# Altium PCB board.PcbDoc
Units mm, origin at the board's own origin, x right, y up, seen from the top; angles counter-clockwise.
Board outline 30 x 16.2 mm, 2 copper layers (Top Layer, Bottom Layer); 12 components, 10 nets, 44 pads, 0 vias.
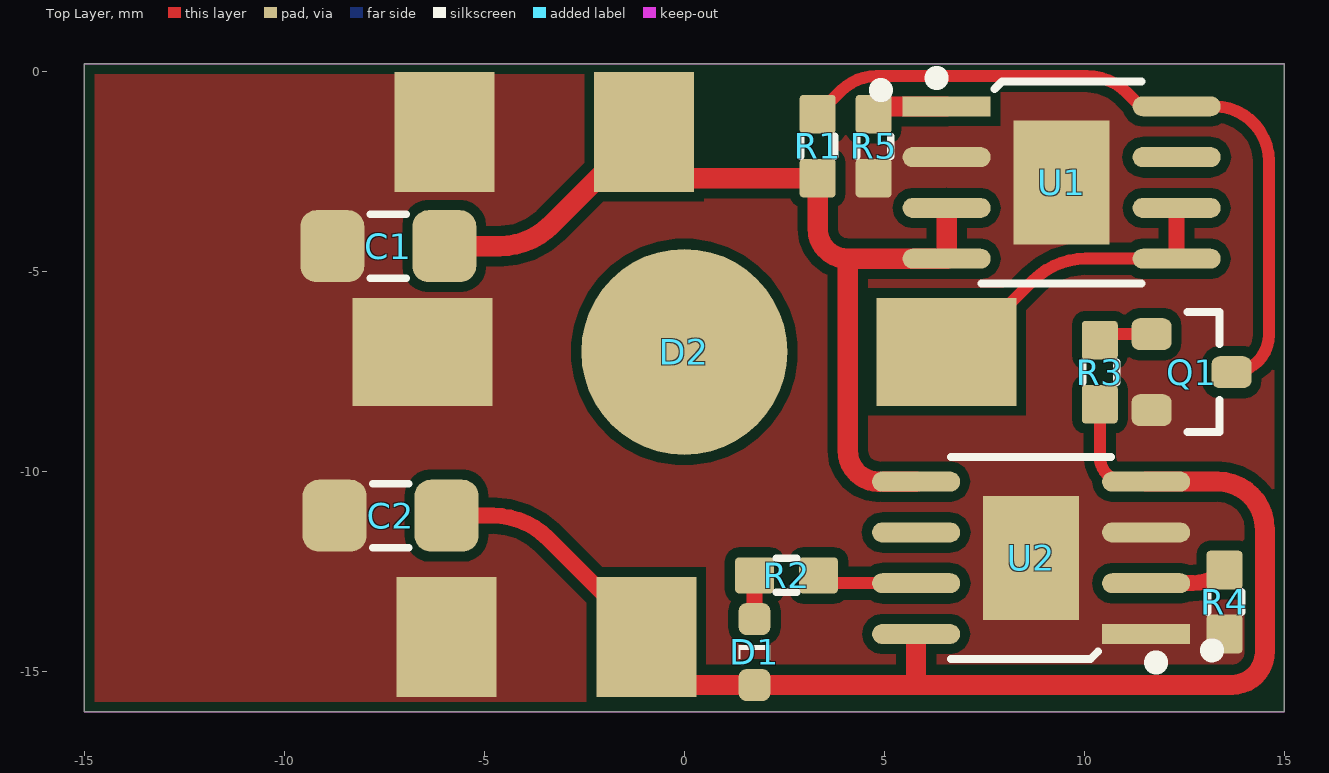
[diagram p0: Top Layer view]
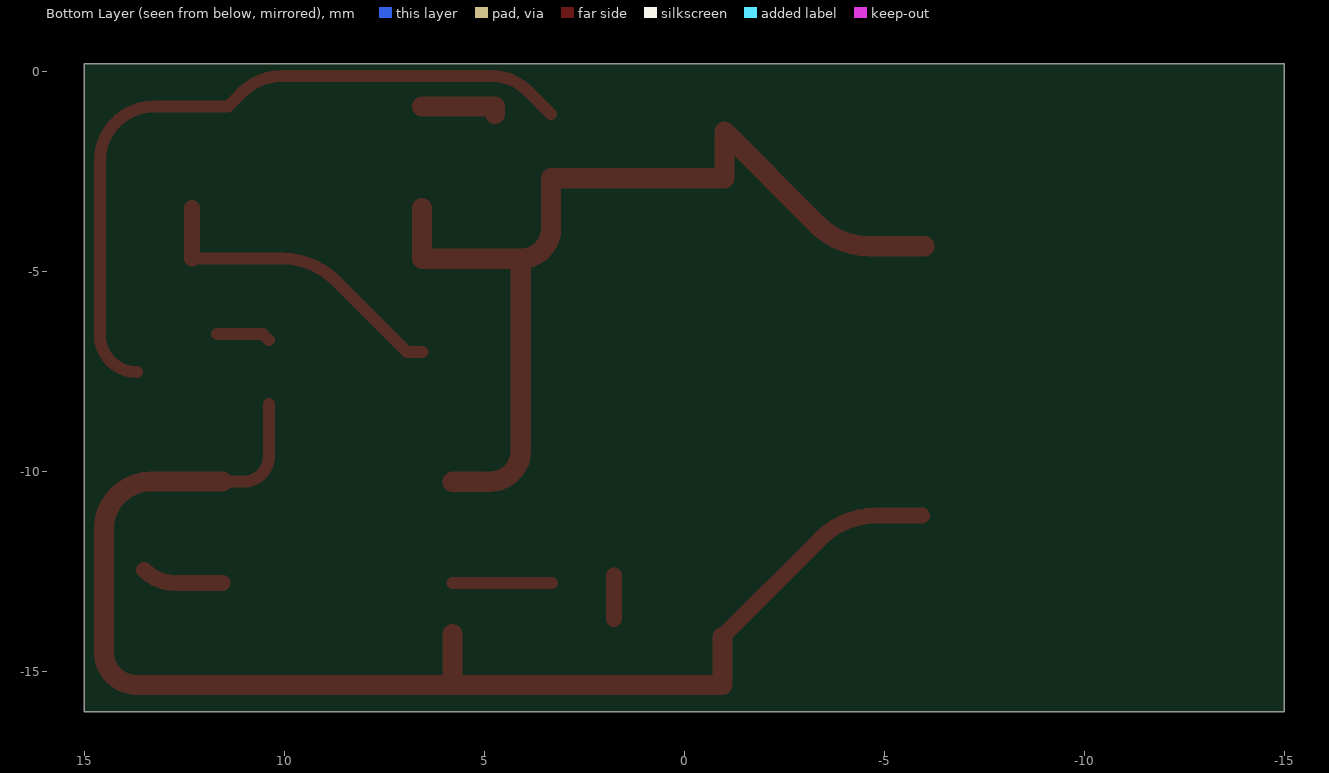
[diagram p1: Bottom Layer view, seen from below]
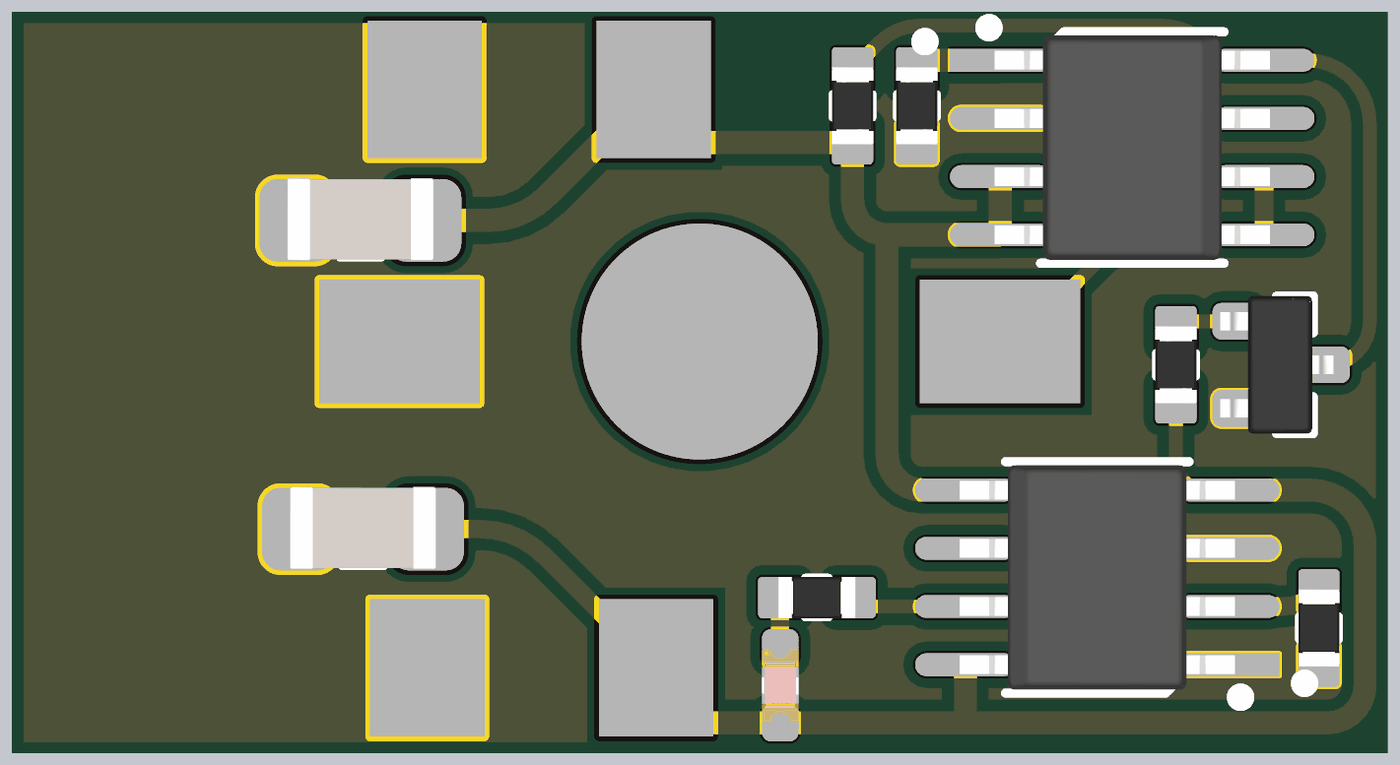
[diagram p2: 3D render of the assembled board from above, using the file's embedded part models]

## Layer stack, top to bottom
Top Solder: solder mask 0.0102, Solder Resist, Dk 3.5
Top Layer: signal copper 0.0356
Dielectric 1: dielectric 0.32, FR-4, Dk 4.8
Bottom Layer: signal copper 0.0356
Bottom Solder: solder mask 0.0102, Solder Resist, Dk 3.5

## Board outline
-15,-16 15,-16 15,0.2 -15,0.2

## Design rules (kind name [scope] priority, off if disabled: settings)
Clearance [All] p1: gap=0.152 ignorepadtopadclearanceinfootprint=FALSE except(0.25: Arc-Fill Arc-Poly Arc-Region Track-Fill Track-Poly Track-Region SMDPad-Fill SMDPad-Poly SMDPad-Region THPad-Fill THPad-Poly THPad-Region Via-Fill Via-Poly Via-Region Fill-Fill Fill-Poly Fill-Region Poly-Poly Poly-Region Region-Region)
ComponentClearance [All] p1: gap=0.254 collisioncheckmode=3 verticalgap=0.254 showdistances=FALSE donotcheckwithout3dbody=TRUE
MinimumSolderMaskSliver [All] p1 off: minsoldermaskwidth=0.254
PolygonConnect [All] p1: connectstyle=Direct reliefconductorwidth=0.254 reliefentries=4 polygonreliefangle="90 Angle" airgapwidth=0.254
RoutingVias [All] p1 off: holewidth=0.711 width=1.27 viastyle="Through Hole" minholewidth=0.711 minwidth=1.27 maxholewidth=0.711 maxwidth=1.27
SilkToSilkClearance [All] p1 off: silktosilkclearance=0.254
SilkToSolderMaskClearance [IsPad] p1 off: minsilkscreentomaskgap=0.254 clearancetoexposedcopper=TRUE
SolderMaskExpansion [All] p1: expansion=0.102 istentingtop=FALSE
SupplyNets "Schematic Supply Nets_5" [InNet('VSB')] p1: voltage=0.000
SupplyNets "Schematic Supply Nets_4" [InNet('VBAT')] p2: voltage=0.000
SupplyNets "Schematic Supply Nets_3" [InNet('GND')] p3: voltage=0.000
Width [All] p1: maxlimit=12.7 minlimit=0.051 preferedwidth=0.254
26 further rules are at their usual default settings.

## Components (designator, comment, footprint, x,y, rotation, side; value= is the part's Value field where it differs from the comment)
C1 "1u" C1206 -7.4,-4.357 r0 top
C2 "1u" C1206 -7.344,-11.095 r0 top
D1 "RED" LED-0603-RED 1.755,-14.504 r270 top
D2 "RED" LED-1W 0,-7 r180 top
Q1 "2N7002" SOT-23 12.681,-7.508 r180 top
R1 "430k" R0603 3.333,-1.856 r90 top
R2 "470" R0603 2.555,-12.589 r180 top
R3 "47k" R0603 10.386,-7.508 r90 top
R4 "4k7" R0603 13.504,-13.254 r90 top
R5 "100k" R0603 4.735,-1.856 r90 top
U1 "CN5711" PowerSOIC-8 9.433,-2.766 r270 top
U2 "TP4056" PowerSOIC-8 8.671,-12.149 r90 top

## Footprints (in the part's own frame and the unit in brackets; to place one, negate y for a bottom-side part, rotate by r counter-clockwise, add the part's x,y. Pads: shape width x height; smd on the part's side, far side on the other; paste and mask are expansions set on the pad)
C1206 [mm] "Chip Capacitor"
  rrect50% 1.6x1.8 smd: 1(-1.4,0) 2(1.4,0)
  silkscreen extent -0.45,-0.8 0.45,0.8, body extent -1.6,-0.88 1.6,0.92, height 1.6
LED-1W [mm]
  rect 3.5x2.7 smd: 1(-6.55,0) 2(6.55,0)
  round 5.15 smd: 3(0,0)
  body extent -5.75,-4 5.75,4, height 5.5
LED-0603-RED [mm]
  rrect50% 0.8x0.8 smd paste+0 mask+0.05: 1(0.825,0) 2(-0.825,0)
  silkscreen extent -0.18,-0.4 0.2,0.4, body extent -0.8,-0.4 0.8,0.4, height 0.6
PowerSOIC-8 [mm]
  rect 0.5x2.2 smd mask+0.05: 1(-1.905,-2.875)
  oval 0.5x2.2 smd mask+0.05: 2(-0.635,-2.875) 3(0.635,-2.875) 4(1.905,-2.875) 5(1.905,2.875) 6(0.635,2.875) 7(-0.635,2.875) 8(-1.905,2.875)
  rect 3.1x2.4 smd mask+0.05: 9(0,0)
  silkscreen extent -2.67,-4.57 2.52,2, body extent -2.45,-3 2.45,3, height 1.68
R0603 [mil] "Chip Resistor; Body 1.6 x 0.8 mm (LxW typ)"
  rrect20% 38x35.43 smd mask+1.97: 1(-31.5,0) 2(31.5,0)
  silkscreen extent -10,-17 10,17, body extent -33,-18 33,18, height 22
SOT-23 [mm]
  rrect50% 1x0.8 smd mask+0.05: 1(1,-0.95) 2(1,0.95) 3(-1,0)
  silkscreen extent -0.7,-1.5 0.1,1.5, body extent -1.27,-1.5 1.33,1.5, height 1.1

## Part data
C1 C2: library part Cap
D1 D2: library part LED-0603-RED, "LED 0603 RED"
R1 R2 R3 R4 R5: library part Res1

## Free pads (board coordinates)
  rect 2.5x3 smd: 4(-6,-1.5) 4(-5.944,-14.122) 4(-1.006,-1.5) 4(-0.95,-14.122)

## Nets (pads, with @x,y where several pads share a name; then routed paths per layer and width w, separated by ;. In a path a pad name is that pad's centre, name@x,y a point inside that pad or via, vN(x,y) a via of type N, cw(c..) or ccw(c..) an arc to the next point about the centre after c; other vN are vias at no path point)
GND: C1.1 C2.1 D2.2 pad.4@-5.944,-14.122 pad.4@-6,-1.5 Q1.2 R4.1 R5.1 U1.2 U1.9 U2.1 U2.3 U2.9
NetD1_2: D1.2 R2.2 | length 1.1
  Top Layer w0.4: D1.2 R2.2
NetD2_1: D2.1 U1.5 U1.6 | length 7.9
  Top Layer w0.3: D2.1 6.936,-7 8.723,-5.212 cw(c10.03,-6.519) 10.03,-4.671 U1.5
  Top Layer w0.4: U1.5 U1.6
NetQ1_1: Q1.1 R3.2 | length 1.4
  Top Layer w0.3: R3.2 10.536,-6.558 Q1.1
NetQ1_3: Q1.3 R1.2 U1.8 | length 18.5
  Top Layer w0.3: R1.2 3.917,-0.471 cw(c4.8,-1.354) 4.8,-0.105 10.062,-0.105 cw(c10.062,-1.525) 11.066,-0.521 11.406,-0.861 U1.8 13.246,-0.861 cw(c13.246,-2.228) 14.613,-2.228 14.613,-6.576 cw(c13.681,-6.576) Q1.3
NetR2_1: R2.1 U2.7 | length 2.5
  Top Layer w0.3: R2.1@3.314,-12.784 U2.7
NetR4_2: R4.2 U2.2 | length 2
  Top Layer w0.4: U2.2 12.707,-12.784 ccw(c12.707,-11.656) R4.2
NetR5_2: R5.2 U1.1 | length 2
  Top Layer w0.5: R5.2 4.735,-0.861 U1.1
VBAT: C1.2 pad.4@-1.006,-1.5 R1.1 U1.3 U1.4 U2.5 | length 24.6
  Top Layer w0.508: C1.2 -4.619,-4.357 ccw(c-4.619,-2.532) -3.329,-3.822 -1.006,-1.5 -1.006,-2.656 R1.1 3.333,-3.918 ccw(c4.086,-3.918) 4.086,-4.671 ; U2.5@4.86,-10.244 cw(c4.86,-9.469) 4.086,-9.469 4.086,-4.671 ; U2.5@4.992,-10.244 U2.5 ; U1.3 U1.4 4.086,-4.671
VSB: C2.2 D1.1 pad.4@-0.95,-14.122 R3.1 U2.4 U2.8 | length 34.1
  Top Layer w0.3: R3.1 10.386,-8.503 10.386,-9.616 ccw(c11.014,-9.616) 11.014,-10.244 U2.4
  Top Layer w0.4: C2.2 -4.787,-11.095 cw(c-4.787,-13.051) -3.404,-11.668 pad.4@-0.95,-14.122
  Top Layer w0.5: pad.4@-0.95,-14.122 -0.95,-15.324 5.796,-15.324 ; U2.8 5.796,-15.324 ; U2.4 13.333,-10.244 cw(c13.333,-11.422) 14.511,-11.422 14.511,-14.506 cw(c13.694,-14.506) 13.694,-15.324 5.796,-15.324
pads on no net: D2.3 U1.7 U2.6

## Polygon pours and split planes (outlines as drawn)
GND on Top Layer "GND_L01_P000" (solid, remove dead copper, pour order 0): -15,0.2 -15,-16 15,-16 15,0.2

## Keep-outs
Keep-Out Layer:
  the board outline again, w0

## Other copper
Top Layer:
  pour cut-out: 9.936,-8.358 9.936,-6.708 10.836,-6.708 10.836,-8.358
  pour cut-out: 2.883,-2.706 2.883,-1.055 3.783,-1.055 3.783,-2.706
  pour cut-out: 1.755,-12.139 3.405,-12.139 3.405,-13.039 1.755,-13.039